# Altium PCB PCB2.pcbdoc
Units mil, origin at the board's own origin, x right, y up, seen from the top; angles counter-clockwise.
Board outline 3264 x 3982 mil, 2 copper layers (Top Layer, Bottom Layer); 42 components, 65 nets, 175 pads, 388 vias.
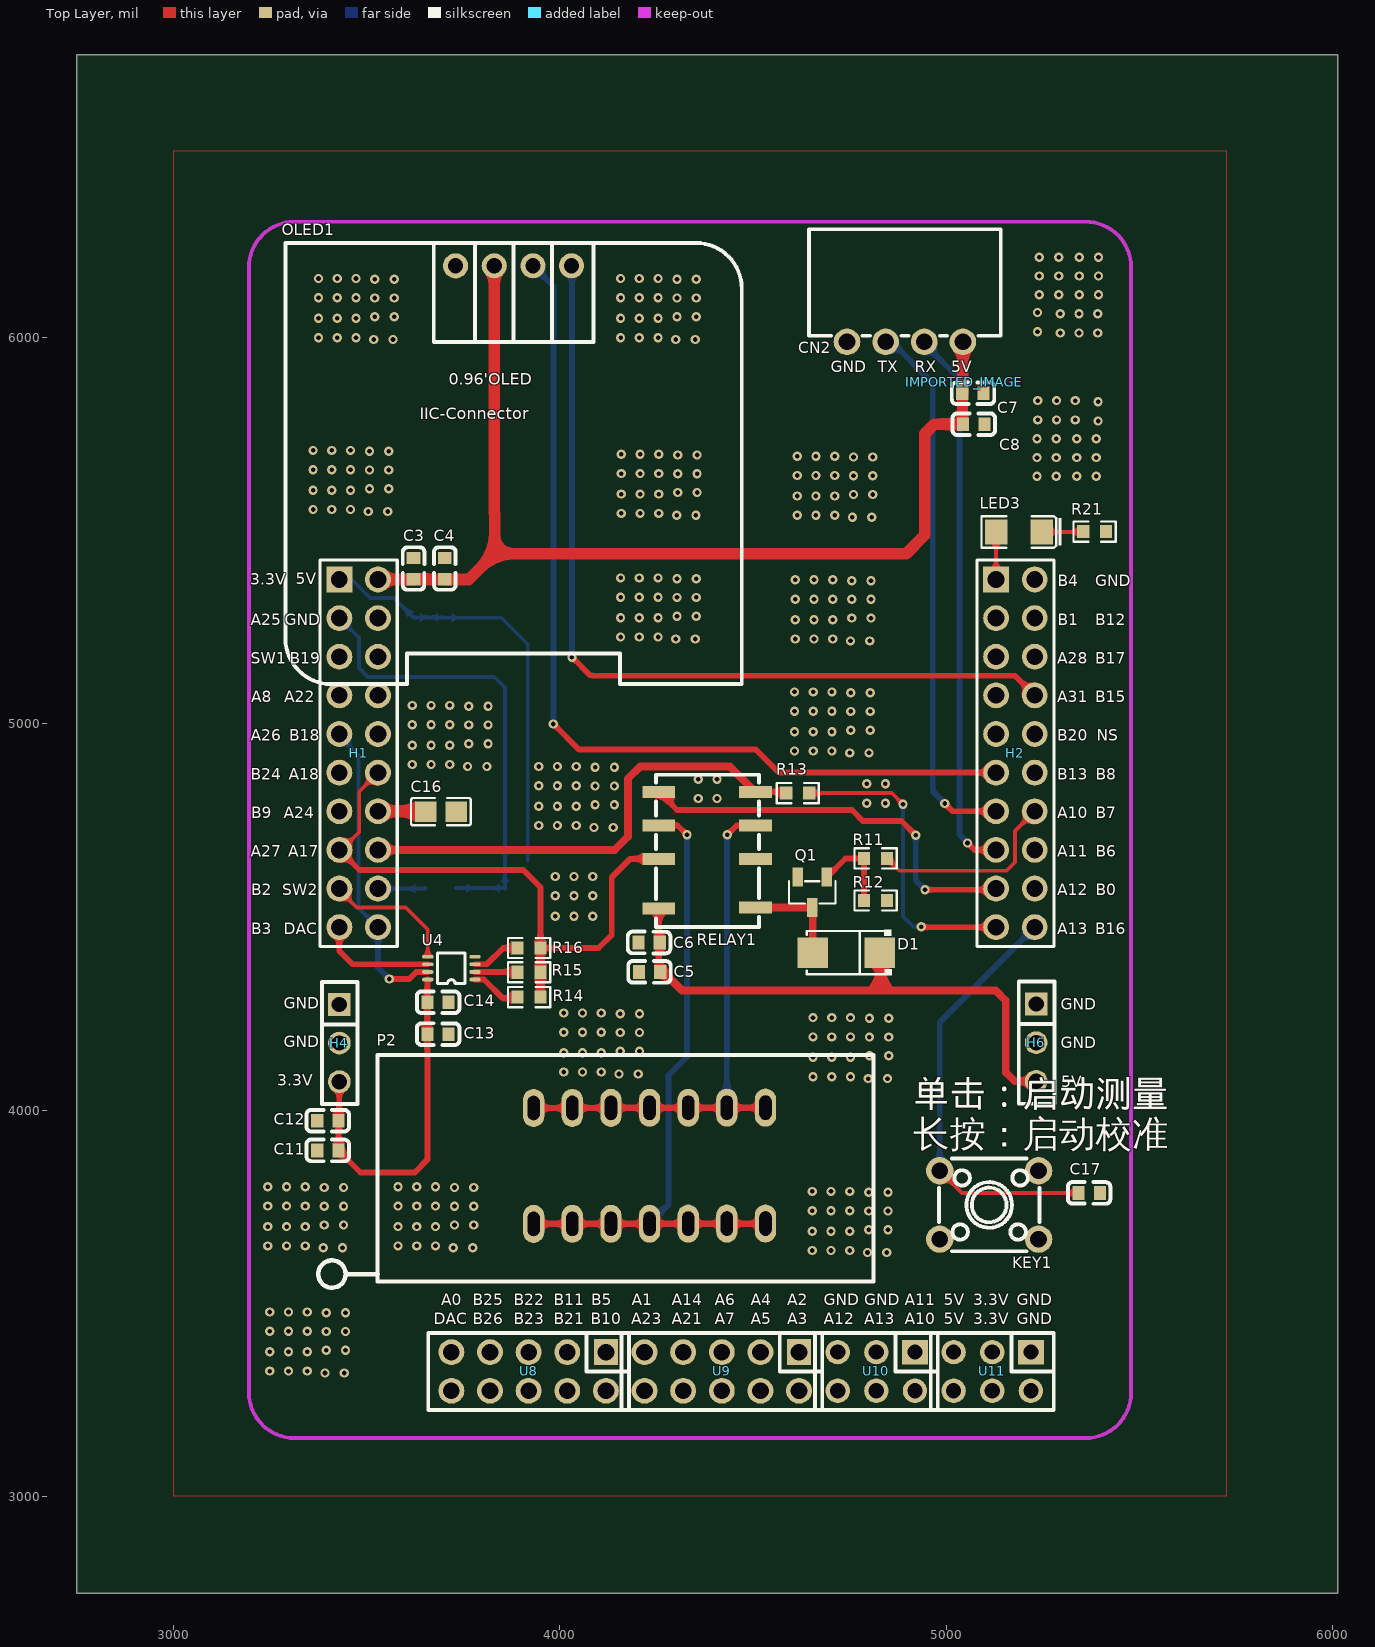
[diagram p0: Top Layer view]
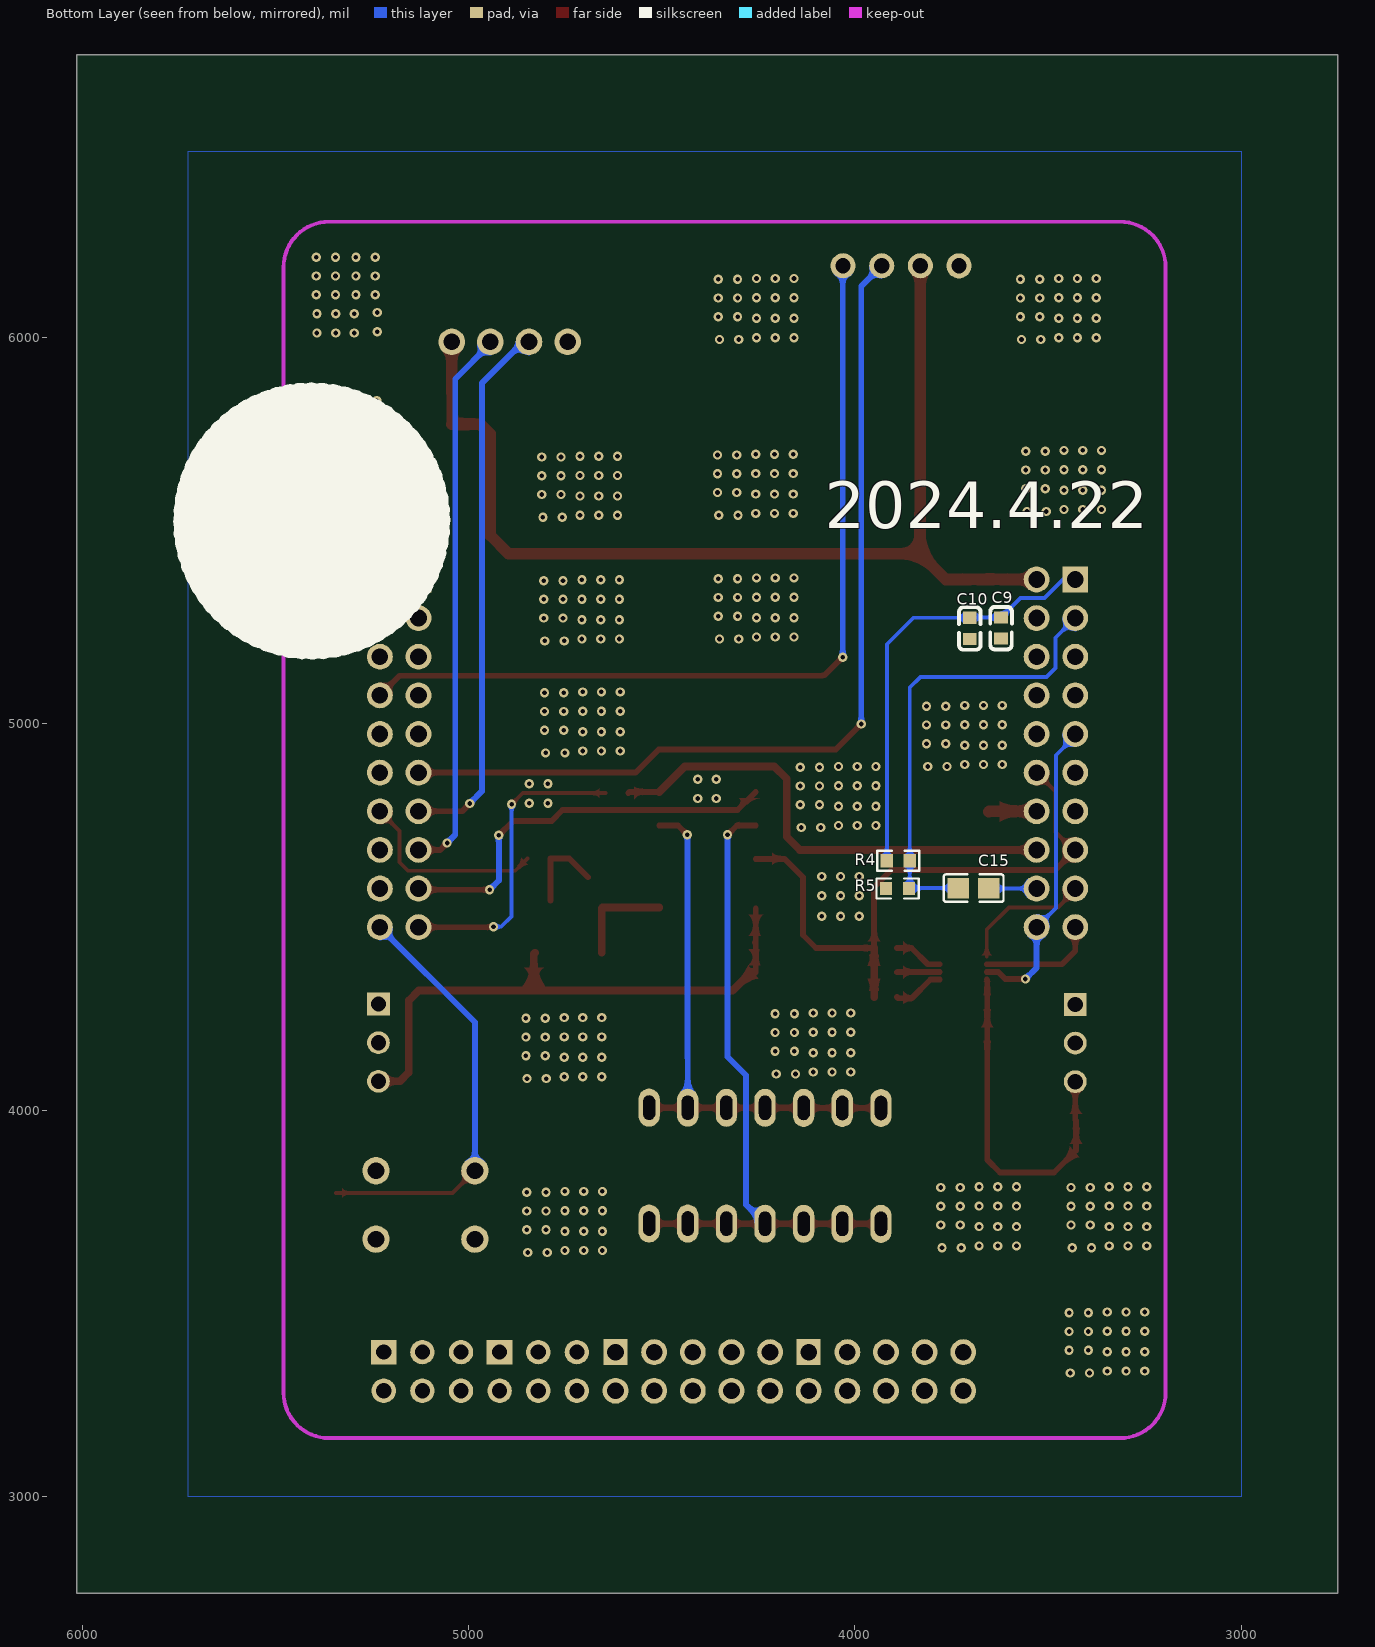
[diagram p1: Bottom Layer view, seen from below]

## Layer stack, top to bottom
Top Layer: signal copper (thickness not stored)
Dielectric: dielectric 12.6, FR-4, Dk 4.8
Bottom Layer: signal copper (thickness not stored)

## Board outline
6014,2750 2750,2750 2750,6732 6014,6732

## Components (designator, comment, footprint, x,y, rotation, side; value= is the part's Value field where it differs from the comment)
C3 "CAP_0603" C0603 3621.56,5401.96 r270 top
C4 "CAP_0603" C0603 3702.45,5401.96 r270 top
C5 "CAP_0603" C0603 4232.56,4358.12 r0 top
C6 "CAP_0603" C0603 4231.56,4434.12 r0 top
C7 "CAP_0603" C0603 5069.56,5855.96 r180 top
C8 "CAP_0603" C0603 5071.56,5775.96 r180 top
C9 "CAP_0603" C0603 3621.56,5248.3 r90 bottom
C10 "CAP_0603" C0603 3702.45,5247.3 r90 bottom
C11 "CAP_0603" C0603 3399.94,3895.96 r0 top
C12 "CAP_0603" C0603 3399.94,3972.96 r0 top
C13 "CAP_0603" C0603 3684.95,4197.17 r180 top
C14 "CAP_0603" C0603 3684.95,4279.78 r180 top
C15 "CAP_0805" C0805 3692.56,4574.96 r0 bottom
C16 "CAP_0805" C0805 3692.56,4772.96 r180 top
C17 "CAP_0603" C0603 5370.56,3785.96 r0 top
CN2 "XH-4AW" CONN-TH_XH-4AW 4893.56,5988.96 r180 top
D1 "SS34_C8678" SMA_L4.3-W2.6-LS5.2-RD 4741.56,4408.03 r180 top
H1 "PZ254V-12-20P" HDR-TH_20P-P2.54-V-M-R2-C10-S2.54 3479.56,4923.96 r270 top
H2 "PZ254V-12-20P" HDR-TH_20P-P2.54-V-M-R2-C10-S2.54 5179.56,4923.96 r270 top
H4 "CS-1165SDIG-1*3" HDR-TH_3P-P2.54_CS-1165SDIG 3429.56,4173.96 r270 top
H6 "CS-1165SDIG-1*3" HDR-TH_3P-P2.54_CS-1165SDIG 5233.28,4174.96 r270 top
IMPORTED_IMAGE "IMPORTED_IMAGE" IMPORTED_IMAGE 5047,5884 r0 top
KEY1 "K4-6×6_SMD" KEY-TH_4P-L6.0-W6.0-P4.50-LS6.5 5111.56,3754.96 r180 top
LED3 "XL-3216UGC" LED1206-R-RD_GREEN 5188.56,5496.96 r180 top
OLED1 "0.96OLED模块_4P" 0.96OLED_4P 3880.56,6185.85 r0 top
P2 "IC锁紧座 14P 2.54mm" "IC锁紧座 14P 2.54mm" 3932.56,3705.96 r90 top
Q1 "SS8050_C2150" SOT-23-3_L2.9-W1.3-P1.90-LS2.4-BR 4653.56,4563.96 r90 top
R4 "Res_0603" R0603 3887.56,4645.96 r180 bottom
R5 "Res_0603" R0603 3889.56,4573.96 r0 bottom
R11 "Res_0603" R0603 4817.49,4651.96 r180 top
R12 "Res_0603" R0603 4817.49,4542.96 r180 top
R13 "Res_0603" R0603 4616.16,4820.96 r180 top
R14 "Res_0603" R0603 3920.56,4292.96 r0 top
R15 "Res_0603" R0603 3920.56,4357.12 r0 top
R16 "Res_0603" R0603 3920.56,4419.96 r0 top
R21 "Res_0603" R0603 5384.56,5497.96 r0 top
RELAY1 "HFD4/5-SR" RELAY-SMD_HFD4-5-SR 4381.56,4672.96 r90 top
U4 "TS5A3359DCUR" VSSOP-8_L2.1-W2.4-P0.50-LS3.2-BR 3719.56,4367.96 r0 top
U8 "2.54-2*5" HDR-TH_10P-P2.54-V-F-R2-C5-S2.54 3919.52,3323.96 r180 top
U9 "2.54-2*5" HDR-TH_10P-P2.54-V-F-R2-C5-S2.54 4419.52,3323.96 r180 top
U10 "PM254-2-03-Z-8.5" HDR-TH_6P-P2.54-V-F-R2-C3-S2.54 4819.52,3323.96 r180 top
U11 "PM254-2-03-Z-8.5" HDR-TH_6P-P2.54-V-F-R2-C3-S2.54 5119.52,3323.96 r180 top

## Footprints (in the part's own frame and the unit in brackets; to place one, negate y for a bottom-side part, rotate by r counter-clockwise, add the part's x,y. Pads: shape width x height; smd on the part's side, far side on the other; paste and mask are expansions set on the pad)
0.96OLED_4P [mm]
  round 1.65 hole 1 copper offset 0,0: 1(-3.81,-0.002) 2(-1.27,0.001) 3(1.27,0.001) 4(3.81,0.001)
  silkscreen extent -15,-27.5 15,1.5
C0603 [mm]
  rect 0.8x0.9 smd: 1(-0.7,0) 2(0.7,0)
  silkscreen extent -1.41,-0.71 1.39,0.72
C0805 [mm]
  rect 1.41x1.35 smd: 1(-1,0) 2(1,0)
  silkscreen extent -1.96,-0.9 1.96,0.9
CONN-TH_XH-4AW [mm]
  round 1.75 hole 1.1: 1(-3.81,0) 2(-1.27,0) 3(1.27,0) 4(3.81,0)
  silkscreen extent -6.3,-7.4 6.3,-0.4
HDR-TH_3P-P2.54_CS-1165SDIG [mm]
  rect 1.5x1.5 hole 1: 1(-2.54,0)
  round 1.5 hole 1: 2(0,0) 3(2.54,0)
  silkscreen extent -4.02,-1.15 4.02,1.2
HDR-TH_6P-P2.54-V-F-R2-C3-S2.54 [mm]
  rect 1.7x1.6 hole 1: 1(-2.54,-1.27)
  round 1.6 hole 1: 2(-2.54,1.27) 3(0,-1.27) 4(0,1.27) 5(2.54,-1.27) 6(2.54,1.27)
  silkscreen extent -4.04,-2.54 4.04,2.54
HDR-TH_10P-P2.54-V-F-R2-C5-S2.54 [mm]
  rect 1.575x1.7 hole 1.1: 1(-5.08,-1.27)
  round 1.7 hole 1.1: 2(-5.08,1.27) 3(-2.54,-1.27) 4(-2.54,1.27) 5(0,-1.27) 6(0,1.27) 7(2.54,-1.27) 8(2.54,1.27) 9(5.08,-1.27) 10(5.08,1.27)
  silkscreen extent -6.6,-2.54 6.6,2.54
HDR-TH_20P-P2.54-V-M-R2-C10-S2.54 [mm]
  rect 1.7x1.7 hole 1.1: 1(-11.43,-1.27)
  round 1.7 hole 1.1: 2(-11.43,1.27) 3(-8.89,-1.27) 4(-8.89,1.27) 5(-6.35,-1.27) 6(-6.35,1.27) 7(-3.81,-1.27) 8(-3.81,1.27) 9(-1.27,-1.27) 10(-1.27,1.27) 11(1.27,-1.27) 12(1.27,1.27) 13(3.81,-1.27) 14(3.81,1.27) 15(6.35,-1.27) 16(6.35,1.27) 17(8.89,-1.27) 18(8.89,1.27) 19(11.43,-1.27) 20(11.43,1.27)
  silkscreen extent -12.7,-2.54 12.7,2.54
"IC锁紧座 14P 2.54mm" [mm]
  oval 2.5x1.4 hole 0.8 slot 1.6 at 0 deg: 1(0,0) 2(0.003,-2.54) 3(0.007,-5.08) 4(0.01,-7.62) 5(0.014,-10.16) 6(0.017,-12.7) 7(0.021,-15.24) 8(7.641,-15.24) 9(7.637,-12.7) 10(7.634,-10.16) 11(7.63,-7.62) 12(7.627,-5.08) 13(7.623,-2.54) 14(7.62,0)
  silkscreen extent -4.2,-22.34 11.1,14.16
IMPORTED_IMAGE [mil]
KEY-TH_4P-L6.0-W6.0-P4.50-LS6.5 [mm]
  round 1.8 hole 1.1: 1(-3.251,-2.25) 2(3.251,-2.25) 3(3.251,2.25) 4(-3.251,2.25)
  silkscreen extent -3.3,-3.05 3.3,3.05
LED1206-R-RD_GREEN [mm]
  rect 1.485x1.62 smd: 1(1.493,0) 2(-1.492,0)
  silkscreen extent -2.77,-1.04 2.46,1.04
R0603 [mil]
  rect 31.75x34.02 smd: 1(-29.66,0) 2(29.66,0)
  silkscreen extent -55,-26 55,26
RELAY-SMD_HFD4-5-SR [mm]
  rect 0.8x2.15 smd: 1(-3.764,-3.175) 2(-0.564,-3.175) 3(1.636,-3.175) 4(3.836,-3.175) 5(3.836,3.175) 6(1.636,3.175) 7(-0.564,3.175) 8(-3.836,3.175)
  silkscreen extent -5.03,-3.41 4.97,3.36
SMA_L4.3-W2.6-LS5.2-RD [mm]
  rect 2x2 smd: 1(-2.2,0) 2(2.2,0)
  silkscreen extent -2.98,-1.5 2.6,1.5
SOT-23-3_L2.9-W1.3-P1.90-LS2.4-BR [mm]
  rect 1.25x0.7 smd: 1(1,-0.95) 2(1,0.95) 3(-1,0)
  silkscreen extent -0.73,-1.53 0.73,1.53
VSSOP-8_L2.1-W2.4-P0.50-LS3.2-BR [mm]
  oval 0.75x0.25 smd: 1(1.55,-0.75) 2(1.55,-0.25) 3(1.55,0.25) 4(1.55,0.75) 5(-1.55,0.75) 6(-1.55,0.25) 7(-1.55,-0.25) 8(-1.55,-0.75)
  silkscreen extent -0.9,-1.02 0.9,1

## Via types
v1: diameter 24, hole 12, Top Layer to Bottom Layer, 388 vias

## Nets (pads, with @x,y where several pads share a name; then routed paths per layer and width w, separated by ;. In a path a pad name is that pad's centre, name@x,y a point inside that pad or via, vN(x,y) a via of type N, cw(c..) or ccw(c..) an arc to the next point about the centre after c; other vN are vias at no path point)
$1N4614: R16.1 U4.3 | length 127.8
  Top Layer w15: U4.3 3811.4,4377.8 3853.56,4419.96 R16.1
$1N4616: R15.1 U4.2 | length 110.7
  Top Layer w15: U4.2 3889.9,4358.12 R15.1
$1N4618: R14.1 U4.1 | length 131.6
  Top Layer w15: U4.1 3804.09,4338.43 3852.56,4289.96 3887.9,4289.96 R14.1
$1N12315: LED3.2 R21.1 | length 108
  Top Layer w10: LED3.2 5353.9,5496.96 R21.1
$1N38664: Q1.1 R11.2 R12.2 | length 226
  Top Layer w15: Q1.1 4739.59,4651.96 R11.2 R12.2
$1N38692: D1.2 Q1.3 RELAY1.8 | length 264.2
  Top Layer w20: 4506.56,4524.75 4653.4,4524.75 Q1.3 4654.95,4523.2 D1.2
+3.3V: C9.2 C10.2 C11.2 C12.2 C13.2 C14.2 H1.1 H4.3 R4.1 U4.8 U11.3 U11.4 | length 2030.5
  Top Layer w15: H4.3 3429.56,3975.02 C12.2 C11.2 3484.5,3838.96 3624.56,3838.96 3657.39,3871.79 C13.2 C14.2 3657.39,4337.27 U4.8
  Bottom Layer w10: H1.1 3461.56,5373.96 3509.56,5325.96 3571.47,5325.96 C9.2 3701.45,5275.86 C10.2 3848.65,5274.86 3917.22,5206.3 R4.1
+5V: C3.2 C4.2 C5.2 C6.2 C7.2 C8.2 CN2.1 D1.1 H1.2 H6.3 OLED1.2 RELAY1.1 U11.5 U11.6 | length 4262.2
  Top Layer w15: 4256.56,4521.95 C6.2@4256.56,4436.68 ; C6.2 C6.2@4256.56,4436.68 ; C5.2 4256.56,4361.68 C6.2@4256.56,4436.68
  Top Layer w20: C5.2 4268.4,4358.12 4316.56,4309.96 4830.88,4309.96 ; D1.1 4830.88,4405.32 4830.88,4309.96 ; H6.3 5177.56,4074.96 5154.56,4097.96 5154.56,4283.96 5128.56,4309.96 4830.88,4309.96
  Top Layer w30: H1.2 3621.12,5373.96 C3.2 C4.2 3702.89,5373.96 3764.56,5373.96 3831.56,5440.96 ; OLED1.2 3830.56,5544.96 3831.56,5543.96 3831.56,5440.96 ; CN2.1 5043.56,5857.52 C7.2 5042,5777.96 C8.2 4969.56,5775.96 4944.56,5750.96 4944.56,5488.96 4896.56,5440.96 3831.56,5440.96
DAC: H1.9 H1.20 U4.7 | length 794.9
  Top Layer w15: v1(3558.56,4339.96) 3610.56,4339.96 3628.72,4358.12 U4.7
  Bottom Layer w10: H1.9 3429.56,4968.96 3479.56,4918.96 3479.56,4523.96 H1.20
  Bottom Layer w15: H1.20 3529.56,4368.96 v1(3558.56,4339.96)
GND: C3.1 C4.1 C5.1 C6.1 C7.1 C8.1 C9.1 C10.1 C11.1 C12.1 C13.1 C14.1 C16.1 C17.2 CN2.4 H1.4 H2.2 H4.1 H4.2 H6.1 H6.2 KEY1.4 OLED1.1 Q1.2 R5.2 R12.1 R21.2 RELAY1.2 U4.4 U10.3 U10.5 U11.1 U11.2
  other v1: 3392.56,3319.96 3442.56,3319.96 3249.56,3324.96 3298.06,3324.96 3346.56,3324.96 3249.56,3374.96 3298.06,3374.96 3346.56,3374.96 3395.56,3378.96 3445.56,3378.96 3395.56,3427.46 3445.56,3427.46 3249.56,3427.96 3298.06,3427.96 3346.56,3427.96 3395.56,3475.96 3445.56,3475.96 3249.56,3477.96 3298.06,3477.96 3346.56,3477.96 4796.56,3631.96 4846.56,3631.96 4653.56,3636.96 4702.06,3636.96 4750.56,3636.96 3387.56,3643.96 3437.56,3643.96 3724.56,3643.96 3774.56,3643.96 3244.56,3648.96 3293.06,3648.96 3341.56,3648.96 3581.56,3648.96 3630.06,3648.96 3678.56,3648.96 4653.56,3686.96 4702.06,3686.96 4750.56,3686.96 4799.56,3690.96 4849.56,3690.96 3244.56,3698.96 3293.06,3698.96 3341.56,3698.96 3581.56,3698.96 3630.06,3698.96 3678.56,3698.96 3390.56,3702.96 3440.56,3702.96 3727.56,3702.96 3777.56,3702.96 4799.56,3739.46 4849.56,3739.46 4653.56,3739.96 4702.06,3739.96 4750.56,3739.96 3390.56,3751.46 3440.56,3751.46 3727.56,3751.46 3777.56,3751.46 3244.56,3751.96 3293.06,3751.96 3341.56,3751.96 3581.56,3751.96 3630.06,3751.96 3678.56,3751.96 4799.56,3787.96 4849.56,3787.96 4653.56,3789.96 4702.06,3789.96 4750.56,3789.96 3390.56,3799.96 3440.56,3799.96 3727.56,3799.96 3777.56,3799.96 3244.56,3801.96 3293.06,3801.96 3341.56,3801.96 3581.56,3801.96 3630.06,3801.96 3678.56,3801.96 4798.56,4081.96 4848.56,4081.96 4655.56,4086.96 4704.06,4086.96 4752.56,4086.96 4153.56,4093.96 4203.56,4093.96 4010.56,4098.96 4059.06,4098.96 4107.56,4098.96 4655.56,4136.96 4704.06,4136.96 4752.56,4136.96 4801.56,4140.96 4851.56,4140.96 4010.56,4148.96 4059.06,4148.96 4107.56,4148.96 4156.56,4152.96 4206.56,4152.96 4801.56,4189.46 4851.56,4189.46 4655.56,4189.96 4704.06,4189.96 4752.56,4189.96 4156.56,4201.46 4206.56,4201.46 4010.56,4201.96 4059.06,4201.96 4107.56,4201.96 4801.56,4237.96 4851.56,4237.96 4655.56,4239.96 4704.06,4239.96 4752.56,4239.96 4156.56,4249.96 4206.56,4249.96 4010.56,4251.96 4059.06,4251.96 4107.56,4251.96 3988.56,4501.96 4037.06,4501.96 4085.56,4501.96 3988.56,4554.96 4037.06,4554.96 4085.56,4554.96 3988.56,4604.96 4037.06,4604.96 4085.56,4604.96 4088.56,4731.96 4138.56,4731.96 3945.56,4736.96 3994.06,4736.96 4042.56,4736.96 3945.56,4786.96 3994.06,4786.96 4042.56,4786.96 4091.56,4790.96 4141.56,4790.96 4794.56,4794.96 4843.06,4794.96 4358.56,4806.96 4407.06,4806.96 4091.56,4839.46 4141.56,4839.46 3945.56,4839.96 3994.06,4839.96 4042.56,4839.96 4794.56,4844.96 4843.06,4844.96 4358.56,4856.96 4407.06,4856.96 4091.56,4887.96 4141.56,4887.96 3761.56,4889.96 3811.56,4889.96 3945.56,4889.96 3994.06,4889.96 4042.56,4889.96 3618.56,4894.96 3667.06,4894.96 3715.56,4894.96 4750.56,4924.96 4800.56,4924.96 4607.56,4929.96 4656.06,4929.96 4704.56,4929.96 3618.56,4944.96 3667.06,4944.96 3715.56,4944.96 3764.56,4948.96 3814.56,4948.96 4607.56,4979.96 4656.06,4979.96 4704.56,4979.96 4753.56,4983.96 4803.56,4983.96 3764.56,4997.46 3814.56,4997.46 3618.56,4997.96 3667.06,4997.96 3715.56,4997.96 4753.56,5032.46 4803.56,5032.46 4607.56,5032.96 4656.06,5032.96 4704.56,5032.96 3764.56,5045.96 3814.56,5045.96 3618.56,5047.96 3667.06,5047.96 3715.56,5047.96 4753.56,5080.96 4803.56,5080.96 4607.56,5082.96 4656.06,5082.96 4704.56,5082.96 4752.56,5214.96 4802.56,5214.96 4300.56,5219.96 4350.56,5219.96 4609.56,5219.96 4658.06,5219.96 4706.56,5219.96 4157.56,5224.96 4206.06,5224.96 4254.56,5224.96 4609.56,5269.96 4658.06,5269.96 4706.56,5269.96 4755.56,5273.96 4805.56,5273.96 4157.56,5274.96 4206.06,5274.96 4254.56,5274.96 4303.56,5278.96 4353.56,5278.96 4755.56,5322.46 4805.56,5322.46 4609.56,5322.96 4658.06,5322.96 4706.56,5322.96 4303.56,5327.46 4353.56,5327.46 4157.56,5327.96 4206.06,5327.96 4254.56,5327.96 4755.56,5370.96 4805.56,5370.96 4609.56,5372.96 4658.06,5372.96 4706.56,5372.96 4303.56,5375.96 4353.56,5375.96 4157.56,5377.96 4206.06,5377.96 4254.56,5377.96 4757.56,5534.96 4807.56,5534.96 4302.56,5539.96 4352.56,5539.96 4614.56,5539.96 4663.06,5539.96 4711.56,5539.96 4159.56,5544.96 4208.06,5544.96 4256.56,5544.96 3504.56,5549.96 3554.56,5549.96 3361.56,5554.96 3410.06,5554.96 3458.56,5554.96 4614.56,5589.96 4663.06,5589.96 4711.56,5589.96 4760.56,5593.96 4810.56,5593.96 4159.56,5594.96 4208.06,5594.96 4256.56,5594.96 4305.56,5598.96 4355.56,5598.96 3361.56,5604.96 3410.06,5604.96 3458.56,5604.96 3507.56,5608.96 3557.56,5608.96 5235.56,5640.96 5285.56,5640.96 5338.56,5640.96 5388.56,5640.96 4760.56,5642.46 4810.56,5642.46 4614.56,5642.96 4663.06,5642.96 4711.56,5642.96 4305.56,5647.46 4355.56,5647.46 4159.56,5647.96 4208.06,5647.96 4256.56,5647.96 3507.56,5657.46 3557.56,5657.46 3361.56,5657.96 3410.06,5657.96 3458.56,5657.96 5235.56,5689.46 5285.56,5689.46 5338.56,5689.46 5388.56,5689.46 4760.56,5690.96 4810.56,5690.96 4614.56,5692.96 4663.06,5692.96 4711.56,5692.96 4305.56,5695.96 4355.56,5695.96 4159.56,5697.96 4208.06,5697.96 4256.56,5697.96 3507.56,5705.96 3557.56,5705.96 3361.56,5707.96 3410.06,5707.96 3458.56,5707.96 5235.56,5737.96 5285.56,5737.96 5338.56,5737.96 5388.56,5737.96 5393.56,5783.96 5237.56,5786.96 5286.06,5786.96 5334.56,5786.96 5393.56,5833.96 5237.56,5836.96 5286.06,5836.96 5334.56,5836.96 3518.56,5994.96 3568.56,5994.96 4300.56,5994.96 4350.56,5994.96 3375.56,5999.96 3424.06,5999.96 3472.56,5999.96 4157.56,5999.96 4206.06,5999.96 4254.56,5999.96 5295.56,6011.96 5344.06,6011.96 5392.56,6011.96 5236.56,6014.96 3375.56,6049.96 3424.06,6049.96 3472.56,6049.96 4157.56,6049.96 4206.06,6049.96 4254.56,6049.96 3521.56,6053.96 3571.56,6053.96 4303.56,6053.96 4353.56,6053.96 5295.56,6061.96 5344.06,6061.96 5392.56,6061.96 5236.56,6064.96 3521.56,6102.46 3571.56,6102.46 4303.56,6102.46 4353.56,6102.46 3375.56,6102.96 3424.06,6102.96 3472.56,6102.96 4157.56,6102.96 4206.06,6102.96 4254.56,6102.96 5241.56,6110.96 5291.56,6110.96 5344.56,6110.96 5394.56,6110.96 3521.56,6150.96 3571.56,6150.96 4303.56,6150.96 4353.56,6150.96 3375.56,6152.96 3424.06,6152.96 3472.56,6152.96 4157.56,6152.96 4206.06,6152.96 4254.56,6152.96 5241.56,6159.46 5291.56,6159.46 5344.56,6159.46 5394.56,6159.46 5241.56,6207.96 5291.56,6207.96 5344.56,6207.96 5394.56,6207.96
GPIO_0: H2.19 R13.1 U10.4 | length 797.3
  Top Layer w10: R13.1 4859.56,4820.96 v1(4888.56,4791.96)
  Top Layer w15: v1(4935.56,4474.96) 4936.56,4473.96 H2.19
  Bottom Layer w10: v1(4888.56,4791.96) 4888.56,4501.96 4915.56,4474.96 v1(4935.56,4474.96)
GPIO_1: H2.17 RELAY1.5 U10.6 | length 1047.6
  Top Layer w15: RELAY1.5 4303.56,4776.96 4756.56,4776.96 4784.56,4748.96 4884.56,4748.96 v1(4921.56,4711.96) ; v1(4945.56,4570.96) 5126.56,4570.96 H2.17
  Bottom Layer w15: v1(4921.56,4711.96) 4921.56,4594.96 v1(4945.56,4570.96)
KEY_START: C17.1 H2.20 KEY1.2 | length 1115.6
  Top Layer w10: KEY1.2 5041.16,3785.96 C17.1
  Bottom Layer w15: KEY1.2 4983.56,4227.96 H2.20
PA0: U8.9
PA1: U9.9
PA2: U9.1
PA3: U9.2
PA4: U9.3
PA5: U9.4
PA6: U9.5
PA7: U9.6
PA8: H1.7
PA10: CN2.3 H2.13 U10.2 | length 1408.4
  Top Layer w15: v1(4996.56,4793.96) 5016.56,4773.96 H2.13
  Bottom Layer w15: CN2.3 4858.56,5988.96 4965.56,5881.96 4965.56,4825.96 4996.56,4794.96 v1(4996.56,4793.96)
PA11: CN2.2 H2.15 U10.1 | length 1424.8
  Top Layer w15: v1(5055.56,4691.96) 5073.56,4673.96 H2.15
  Bottom Layer w15: CN2.2 4943.56,5983.96 5034.56,5892.96 5034.56,4712.96 v1(5055.56,4691.96)
PA14: U9.7
PA16: C15.1 H1.18 | length 133.4
  Top Layer w10: H1.18 H1.18@3536.19,4580.59
  Bottom Layer w10: H1.18 3652.19,4573.96 C15.1
PA17: H1.16 R13.2 RELAY1.4 | length 1262.9
  Top Layer w15: RELAY1.4 4583.5,4823.96 R13.2
  Top Layer w20: H1.16 4142.56,4673.96 4176.56,4707.96 4176.56,4857.96 4208.56,4889.96 4440.56,4889.96 RELAY1.4
PA18: H1.12 H1.15 R14.2 R15.2 R16.2 RELAY1.7 | length 1578.8
  Top Layer w10: H1.15 3434.96,4673.96 3481,4720 3481,4825.4 H1.12
  Top Layer w15: H1.15 3481.56,4621.96 3905.56,4621.96 3950.22,4577.3 R16.2 4100.56,4419.96 4134.56,4453.96 4134.56,4602.96 4182.35,4650.74 RELAY1.7
  Top Layer w20: R14.2 R15.2 R16.2
PA21: U9.8
PA22: H1.8
PA23: U9.10
PA24: C16.2 H1.14 | length 124
  Top Layer w30: H1.14 3652.19,4773.96 C16.2
PA25: C15.2 H1.3 R4.2 R5.1 | length 1196.8
  Bottom Layer w10: H1.3 3480.56,5222.96 3480.56,5144.96 3503.56,5121.96 3830.56,5121.96 3857.9,5094.62 R4.2 3857.9,4575.96 R5.1@3858.9,4574.96 ; C15.2 R5.1@3858.9,4574.96 ; R5.1 R5.1@3858.9,4574.96
PA28: H2.5
PA31: H2.7
PB0: H2.18
PB1: H2.3
PB2: H1.17 U4.5 | length 345.7
  Top Layer w10: H1.17 3429.56,4569.96 3474.56,4524.96 3601.56,4524.96 3658.55,4467.97 U4.5
PB3: H1.19 U4.6 | length 305.1
  Top Layer w15: H1.19 3429.56,4411.96 3463.72,4377.8 U4.6
PB4: H2.1 LED3.1 | length 123.1
  Top Layer w10: H2.1 5129.56,5496.72 LED3.1
PB5: U8.1
PB6: H2.16
PB7: H2.14 R11.1 | length 506.9
  Top Layer w10: R11.1 4879.15,4619.96 5156.56,4619.96 5178.56,4641.96 5178.56,4722.96 H2.14
PB8: H2.12
PB9: H1.13
PB10: U8.2
PB11: U8.3
PB12: H2.4
PB13: H2.11 OLED1.3 | length 2406.1
  Top Layer w15: v1(3983.56,4999.96) 4049.56,4933.96 4507.56,4933.96 4567.56,4873.96 H2.11
  Bottom Layer w15: OLED1.3 3983.56,6132.9 v1(3983.56,4999.96)
PB15: H2.8 OLED1.4 | length 2252.4
  Top Layer w15: v1(4031.56,5172.96) 4078.56,5125.96 4083.56,5125.96 4084.56,5124.96 5178.56,5124.96 H2.8
  Bottom Layer w15: OLED1.4 4031.56,6184.9 v1(4031.56,5172.96)
PB17: H2.6
PB18: H1.10
PB19: H1.6
PB20: H2.9
PB21: U8.4
PB22: U8.5
PB23: U8.6
PB23/PA9: H1.5
PB24: H1.11
PB25: U8.7
PB26: U8.8
PB27: U8.10
ZX+: P2.1 P2.2 P2.3 P2.4 P2.5 P2.6 P2.7 RELAY1.6 | length 1730.2
  Top Layer w15: P2.1 4032.42,3705.96 P2.2 4132.42,3706.09 P2.3 4232.42,3706.23 P2.4 4232.7,3706.5 P2.5 4432.42,3706.5 P2.6 4532.42,3706.63 P2.7 ; RELAY1.6 4305.16,4737.35 v1(4329.56,4712.96)
  Bottom Layer w15: P2.4 4281.56,3755.36 4281.56,4090.69 4329.56,4138.69 v1(4329.56,4712.96)
ZX-: P2.8 P2.9 P2.10 P2.11 P2.12 P2.13 P2.14 RELAY1.3 | length 1390.2
  Top Layer w15: P2.14 4032.42,4005.96 P2.13 4132.42,4006.09 P2.12 4132.7,4006.36 P2.11 4332.42,4006.36 P2.10 4432.42,4006.5 P2.9 4432.7,4006.77 P2.8 ; v1(4433.56,4712.96) 4457.95,4737.35 RELAY1.3
  Bottom Layer w15: P2.9 4432.56,4134.22 4433.3,4134.96 4433.3,4712.69 v1(4433.56,4712.96)
"": H2.10 KEY1.1 KEY1.3

## Polygon pours and split planes (outlines as drawn)
GND on Top Layer (solid, remove dead copper, pour order 0): 3000,3002 5727,3002 5727,6482 3000,6482
GND on Bottom Layer (solid, remove dead copper, pour order 1): 3000,3000 5726,3000 5726,6482 3000,6482

## Keep-outs
Board Outline Layer:
  lines w10 net "": 3195.56,3269.49 ccw(c3313.67,3269.49) 3313.67,3151.38 5360.91,3151.38 ccw(c5360.91,3269.49) 5479.02,3269.49 5479.02,6181.85 ccw(c5360.91,6181.85) 5360.91,6299.96 3313.67,6299.96 ccw(c3313.67,6181.85) 3195.56,6181.85 3195.56,3269.49

## Other copper
Top Layer:
  drawing of 101 lines, arcs and shapes, not listed
Bottom Layer:
  region net PA25: 3829.02,4579.96 3829.02,4569.96 cw(c3829.02,4551.21) 3844.02,4562.46 3844.02,4587.46 cw(c3829.02,4598.71)
  region net PA25: 3862.9,4605.96 3852.9,4605.96 cw(c3834.15,4605.96) 3845.4,4590.96 3870.4,4590.96 cw(c3881.65,4605.96)
  region net PA25: 3852.9,4613.95 3862.9,4613.95 cw(c3881.65,4613.95) 3870.4,4628.95 3845.4,4628.95 cw(c3834.15,4613.95)
  region net PA25: 3862.9,4677.96 3852.9,4677.96 cw(c3834.15,4677.96) 3845.4,4662.96 3870.4,4662.96 cw(c3881.65,4677.96)
  region net +3.3V: 3922.22,4677.96 3912.22,4677.96 cw(c3893.47,4677.96) 3904.72,4662.96 3929.72,4662.96 cw(c3940.97,4677.96)
  region net DAC: 3500.88,4509.71 3493.81,4502.64 3495.19,4501.16 3495.97,4500.22 3496.65,4499.3 3497.23,4498.41 3497.72,4497.54 3498.12,4496.68 3498.44,4495.84 3498.69,4495.02 3498.86,4494.2 3498.97,4493.39 3499.02,4492.58 3499.01,4491.77 3498.96,4490.96 3498.81,4489.74 3498.48,4488.06 3497.13,4482.57 3496.6,4479.96 3496.29,4477.69 3496.14,4475.87 3496.09,4473.93 3496.16,4471.86 3531.66,4507.36 3529.59,4507.42 3527.65,4507.38 3525.82,4507.23 3523.55,4506.92 3520.94,4506.39 3515.45,4505.04 3513.78,4504.71 3512.55,4504.55 3511.74,4504.5 3510.94,4504.5 3510.13,4504.55 3509.32,4504.66 3508.5,4504.83 3507.67,4505.07 3506.83,4505.39 3505.98,4505.79 3505.11,4506.28 3504.22,4506.86 3503.3,4507.54 3502.35,4508.33
  region net DAC: 3522.06,4428.4 3537.06,4428.4 3537.12,4430.18 3537.22,4431.28 3537.36,4432.32 3537.56,4433.29 3537.8,4434.21 3538.08,4435.07 3538.4,4435.88 3538.76,4436.64 3539.16,4437.37 3539.59,4438.05 3540.06,4438.71 3540.56,4439.33 3541.38,4440.23 3542.25,4441.08 3543.52,4442.18 3548.2,4445.82 3550.57,4447.78 3552.6,4449.65 3554.25,4451.36 3554.66,4451.82 3504.46,4451.82 3506.11,4450.06 3507.74,4448.5 3510.14,4446.44 3515.27,4442.45 3516.56,4441.36 3517.46,4440.51 3518.29,4439.64 3518.81,4439.02 3519.3,4438.38 3519.75,4437.71 3520.17,4437.01 3520.55,4436.27 3520.89,4435.48 3521.19,4434.64 3521.45,4433.76 3521.66,4432.81 3521.84,4431.81 3521.96,4430.74 3522.05,4429.01
  region net PA16: 3575.12,4568.96 3575.12,4578.96 3573.1,4579.02 3571.88,4579.14 3570.75,4579.3 3569.71,4579.52 3568.75,4579.8 3567.86,4580.12 3567.04,4580.48 3566.28,4580.9 3565.58,4581.35 3564.93,4581.85 3564.32,4582.38 3563.76,4582.96 3563.22,4583.57 3562.46,4584.55 3561.51,4585.96 3558.59,4590.8 3557.11,4593.02 3555.73,4594.84 3554.54,4596.24 3553.2,4597.64 3551.69,4599.05 3551.69,4548.86 3553.2,4550.27 3554.54,4551.68 3555.73,4553.07 3557.11,4554.9 3558.59,4557.11 3561.51,4561.95 3562.46,4563.37 3563.22,4564.35 3563.76,4564.96 3564.32,4565.53 3564.93,4566.07 3565.58,4566.56 3566.28,4567.02 3567.04,4567.43 3567.86,4567.8 3568.75,4568.12 3569.71,4568.39 3570.75,4568.61 3571.88,4568.78 3573.1,4568.89
  region net DAC: 3455.74,4935.71 3462.81,4942.78 3462.26,4943.4 3461.78,4944.09 3461.37,4944.84 3461.03,4945.65 3460.75,4946.52 3460.53,4947.43 3460.36,4948.39 3460.18,4950.42 3460.18,4952.6 3460.43,4956.05 3461.29,4962.06 3462.75,4971.28 3462.93,4973.32 3462.99,4975.19 3462.96,4976.05 3427.46,4940.56 3430.29,4940.47 3433.45,4940.55 3440.44,4941.07 3442.55,4941.16 3444.19,4941.13 3445.4,4941.03 3446.59,4940.86 3447.38,4940.69 3448.17,4940.49 3448.95,4940.23 3449.74,4939.93 3450.52,4939.57 3451.31,4939.16 3452.1,4938.68 3452.89,4938.15 3453.7,4937.54 3454.92,4936.5
  region net PA25: 3458.24,5238.21 3465.31,5245.28 3463.93,5246.75 3463.15,5247.69 3462.47,5248.61 3461.89,5249.5 3461.4,5250.38 3461,5251.23 3460.68,5252.07 3460.43,5252.9 3460.26,5253.71 3460.15,5254.53 3460.1,5255.33 3460.11,5256.14 3460.16,5256.95 3460.31,5258.18 3460.64,5259.85 3461.99,5265.34 3462.52,5267.95 3462.83,5270.22 3462.98,5272.05 3463.03,5273.99 3462.96,5276.05 3427.46,5240.56 3429.53,5240.49 3431.47,5240.54 3433.3,5240.68 3435.57,5241 3438.18,5241.52 3443.67,5242.88 3445.34,5243.2 3446.57,5243.36 3447.38,5243.41 3448.18,5243.42 3448.99,5243.37 3449.8,5243.26 3450.62,5243.08 3451.45,5242.84 3452.29,5242.52 3453.14,5242.12 3454.01,5241.63 3454.9,5241.05 3455.82,5240.37 3456.77,5239.59
  region net KEY_START: 5192.04,4447.04 5202.65,4436.44 5203.95,4437.66 5204.8,4438.37 5205.64,4439 5206.46,4439.55 5207.28,4440.03 5208.08,4440.44 5208.88,4440.78 5209.68,4441.07 5210.47,4441.3 5211.27,4441.48 5212.06,4441.61 5212.86,4441.69 5214.06,4441.75 5215.29,4441.73 5216.96,4441.62 5222.84,4440.89 5225.9,4440.59 5228.67,4440.48 5231.04,4440.52 5231.66,4440.56 5196.16,4476.05 5196.08,4473.64 5196.13,4471.38 5196.38,4468.23 5197.18,4461.78 5197.32,4460.1 5197.36,4458.87 5197.33,4457.65 5197.26,4456.86 5197.15,4456.06 5197,4455.27 5196.79,4454.47 5196.54,4453.68 5196.22,4452.88 5195.84,4452.08 5195.4,4451.27 5194.88,4450.45 5194.3,4449.62 5193.63,4448.77 5192.47,4447.48
  region net +3.3V: 3602.28,5302.22 3593.24,5297.12 cw(c3566.72,5270.6) 3603.84,5275.9 3623.49,5291.61 cw(c3628.79,5328.73)
  region net +3.3V: 3654.28,5270.86 3654.28,5280.86 cw(c3654.28,5299.61) 3639.28,5288.36 3639.28,5263.36 cw(c3654.28,5252.11)
  region net +3.3V: 3669.74,5280.86 3669.74,5270.86 cw(c3669.74,5252.11) 3684.74,5263.36 3684.74,5288.36 cw(c3669.74,5299.61)
  region net +3.3V: 3735.17,5269.86 3735.17,5279.86 cw(c3735.17,5298.61) 3720.17,5287.36 3720.17,5262.36 cw(c3735.17,5251.11)
  region net PA11: 4968.92,5947.99 4979.53,5958.6 4979.01,5959.18 4978.55,5959.83 4978.15,5960.55 4977.8,5961.33 4977.5,5962.17 4977.25,5963.06 4977.05,5964 4976.76,5966.01 4976.62,5968.16 4976.62,5971.58 4977.02,5977.55 4977.92,5987.59 4977.98,5989.45 4977.94,5991.11 4941.4,5954.57 4949.3,5954.36 4953.81,5954.22 4955.96,5954.04 4957.64,5953.8 4958.87,5953.56 4960.08,5953.26 4961.28,5952.88 4962.46,5952.43 4963.63,5951.89 4964.78,5951.25 4965.92,5950.52 4967.06,5949.67 4968.18,5948.7
  region net PA10: 4878.92,5957.99 4889.53,5968.6 4888,5970.22 4886.48,5972.03 4885.01,5974 4883.6,5976.09 4882.29,5978.27 4881.1,5980.53 4880.06,5982.82 4879.19,5985.13 4878.72,5986.66 4878.35,5988.17 4878.09,5989.66 4877.94,5991.11 4841.4,5954.57 4842.45,5954.55 4843.54,5954.59 4845.25,5954.76 4847.03,5955.05 4850.14,5955.74 4860.03,5958.56 4864.62,5959.74 4867.15,5960.24 4868.99,5960.49 4870.76,5960.61 4871.89,5960.62 4872.99,5960.55 4874.04,5960.41 4875.05,5960.18 4875.53,5960.04 4876.01,5959.87 4876.47,5959.68 4876.91,5959.46 4877.34,5959.22 4877.76,5958.95 4878.16,5958.66 4878.55,5958.34
  region net PA25: 3774.69,4569.96 3774.69,4579.96 cw(c3774.69,4598.71) 3759.69,4587.46 3759.69,4562.46 cw(c3774.69,4551.21)
  region net PA16: 3610.43,4578.96 3610.43,4568.96 cw(c3610.43,4550.21) 3625.43,4561.46 3625.43,4586.46 cw(c3610.43,4597.71)
  region net PB15: 4024.06,6141.68 4039.06,6141.68 4039.11,6143.3 4039.26,6144.8 4039.42,6145.73 4039.61,6146.62 4039.84,6147.46 4040.12,6148.26 4040.42,6149.03 4040.77,6149.76 4041.14,6150.46 4041.55,6151.13 4042.22,6152.09 4042.95,6153 4044.02,6154.17 4045.48,6155.59 4050.51,6160.01 4053.07,6162.43 4054.92,6164.42 4006.2,6164.42 4007.87,6162.64 4009.53,6161.09 4011.57,6159.4 4016.13,6156.08 4018.16,6154.57 4019.39,6153.53 4020.24,6152.71 4020.76,6152.14 4021.26,6151.53 4021.72,6150.9 4022.14,6150.22 4022.53,6149.51 4022.87,6148.74 4023.18,6147.93 4023.44,6147.05 4023.66,6146.12 4023.83,6145.12 4023.96,6144.05 4024.05,6142.3
  region net PB13: 3956.53,6149.33 3967.13,6159.94 3965.96,6161.19 3964.97,6162.41 3964.4,6163.21 3963.9,6163.99 3963.47,6164.78 3963.1,6165.55 3962.79,6166.32 3962.54,6167.09 3962.34,6167.86 3962.18,6168.63 3962.07,6169.4 3961.97,6170.57 3961.95,6171.75 3962.02,6173.35 3962.59,6178.53 3962.96,6182.41 3963.06,6185.07 3963.01,6187.34 3962.98,6187.94 3928.53,6153.48 3930.84,6153.41 3933.53,6153.47 3937,6153.77 3942.7,6154.41 3944.32,6154.5 3945.5,6154.5 3946.67,6154.44 3947.45,6154.34 3948.22,6154.21 3948.98,6154.03 3949.75,6153.8 3950.52,6153.52 3951.3,6153.18 3952.07,6152.78 3952.86,6152.32 3953.65,6151.79 3954.46,6151.18 3955.69,6150.13
  region net KEY_START: 4991.06,3891.8 4976.06,3891.8 4976,3889.86 4975.89,3888.68 4975.73,3887.56 4975.52,3886.52 4975.26,3885.54 4974.96,3884.63 4974.61,3883.77 4974.22,3882.96 4973.79,3882.2 4973.32,3881.48 4972.81,3880.79 4972.26,3880.14 4971.38,3879.21 4970.43,3878.33 4968.7,3876.92 4963.57,3873.08 4960.98,3870.96 4959.22,3869.33 4957.43,3867.49 4956.99,3866.99 5010.13,3866.99 5008.35,3868.9 5006.58,3870.57 5004.4,3872.41 4999.15,3876.36 4997.36,3877.76 4996.05,3878.91 4995.14,3879.83 4994.58,3880.46 4994.05,3881.13 4993.56,3881.83 4993.11,3882.57 4992.7,3883.36 4992.33,3884.19 4992,3885.08 4991.72,3886.03 4991.49,3887.03 4991.3,3888.11 4991.17,3889.26 4991.07,3891.13
  region net ZX+: 4276.03,3739.23 4272.68,3757.09 4269.27,3753.85 4267.17,3752.07 4265.74,3750.99 4264.3,3750.01 4262.85,3749.16 4261.39,3748.44 4259.91,3747.88 4259.17,3747.67 4258.43,3747.5 4257.69,3747.37 4256.94,3747.3 4256.2,3747.28 4255.45,3747.31 4254.7,3747.4 4253.95,3747.55 4253.2,3747.76 4252.46,3748.03 4251.71,3748.36 4250.96,3748.77 4250.21,3749.24 4249.46,3749.78 4260.12,3707.41 4260.17,3709 4260.32,3710.6 4260.57,3712.22 4260.91,3713.84 4261.49,3716 4262.21,3718.17 4263.06,3720.32 4264.28,3722.98 4265.66,3725.59 4267.5,3728.63 4269.49,3731.54 4271.61,3734.3 4273.8,3736.87
  region net ZX-: 4440.06,4077.31 4425.06,4077.31 4425.01,4075.54 4424.74,4072.74 4424.25,4069.81 4423.55,4066.8 4422.66,4063.79 4421.58,4060.81 4420.33,4057.93 4418.91,4055.2 4417.89,4053.49 4416.8,4051.89 4415.64,4050.42 4414.43,4049.09 4413.81,4048.49 4451.31,4048.49 4450.07,4049.74 4448.89,4051.14 4447.77,4052.68 4446.71,4054.33 4445.72,4056.09 4444.35,4058.88 4443.16,4061.79 4442.14,4064.79 4441.31,4067.81 4440.68,4070.79 4440.27,4073.69 4440.11,4075.54
  region net GPIO_0: 4919.22,4479.96 4919.22,4469.96 4919.79,4469.93 4920.36,4469.87 4920.93,4469.76 4921.49,4469.61 4922.05,4469.43 4923.16,4468.98 4924.24,4468.41 4925.28,4467.77 4926.26,4467.07 4927.62,4465.96 4927.62,4483.96 4926.26,4482.84 4925.28,4482.14 4924.24,4481.5 4923.16,4480.94 4922.05,4480.48 4921.49,4480.3 4920.93,4480.15 4920.36,4480.05 4919.79,4479.98
  region net GPIO_1: 4939.31,4587.81 4928.7,4577.21 4930.84,4575.21 4931.6,4574.45 4931.95,4574.07 4932.28,4573.68 4932.57,4573.26 4932.84,4572.83 4933.07,4572.38 4933.26,4571.89 4933.41,4571.37 4933.52,4570.81 4933.58,4570.2 4946.31,4582.93 4945.71,4583 4945.15,4583.11 4944.63,4583.26 4944.14,4583.45 4943.68,4583.68 4943.25,4583.94 4942.84,4584.24 4942.45,4584.56 4941.69,4585.28 4939.74,4587.37
  region net ZX+: 4322.06,4696.62 4337.06,4696.62 4336.96,4699.55 4336.95,4700.62 4336.98,4701.13 4337.03,4701.64 4337.11,4702.14 4337.23,4702.63 4337.39,4703.12 4337.6,4703.6 4337.86,4704.07 4338.18,4704.55 4338.56,4705.02 4320.56,4705.02 4320.94,4704.55 4321.26,4704.07 4321.52,4703.6 4321.73,4703.12 4321.89,4702.63 4322.01,4702.14 4322.09,4701.64 4322.14,4701.13 4322.17,4700.09 4322.07,4697.24
  region net ZX-: 4425.8,4696.62 4440.8,4696.62 4440.78,4699.5 4440.83,4700.59 4440.96,4701.64 4441.07,4702.15 4441.21,4702.65 4441.39,4703.14 4441.61,4703.63 4441.88,4704.1 4442.19,4704.56 4442.56,4705.02 4424.56,4705.02 4424.96,4704.53 4425.28,4704.05 4425.53,4703.57 4425.73,4703.09 4425.87,4702.61 4425.97,4702.13 4426.02,4701.64 4426.05,4701.15 4426.02,4700.12 4425.81,4697.26
  region net GPIO_0: 4883.56,4775.62 4893.56,4775.62 4893.58,4776.19 4893.65,4776.76 4893.76,4777.32 4893.9,4777.89 4894.08,4778.45 4894.54,4779.56 4895.1,4780.64 4895.75,4781.67 4896.45,4782.66 4897.56,4784.02 4879.56,4784.02 4880.67,4782.66 4881.37,4781.67 4882.02,4780.64 4882.58,4779.56 4883.04,4778.45 4883.22,4777.89 4883.36,4777.32 4883.47,4776.76 4883.54,4776.19
  region net GPIO_1: 4914.06,4695.62 4929.06,4695.62 4928.96,4698.55 4928.95,4699.62 4928.98,4700.13 4929.03,4700.64 4929.11,4701.14 4929.23,4701.63 4929.39,4702.12 4929.6,4702.6 4929.86,4703.07 4930.18,4703.55 4930.56,4704.02 4912.56,4704.02 4912.94,4703.55 4913.26,4703.07 4913.52,4702.6 4913.73,4702.12 4913.89,4701.63 4914.01,4701.14 4914.09,4700.64 4914.14,4700.13 4914.17,4699.09 4914.07,4696.24
  region net PA11: 5049.31,4708.81 5038.7,4698.21 5040.84,4696.21 5041.6,4695.45 5041.95,4695.07 5042.28,4694.68 5042.57,4694.26 5042.84,4693.83 5043.07,4693.38 5043.26,4692.89 5043.41,4692.37 5043.52,4691.81 5043.58,4691.2 5056.31,4703.93 5055.71,4704 5055.15,4704.11 5054.63,4704.26 5054.14,4704.45 5053.68,4704.68 5053.25,4704.94 5052.84,4705.24 5052.45,4705.56 5051.69,4706.28 5049.74,4708.37
  region net PA10: 4990.81,4811.31 4980.2,4800.71 4981.37,4799.49 4982.11,4798.63 4982.79,4797.74 4983.4,4796.8 4983.67,4796.32 4983.91,4795.83 4984.11,4795.33 4984.29,4794.81 4984.43,4794.29 4984.53,4793.75 4984.58,4793.2 4997.31,4805.93 4996.65,4806 4996.07,4806.12 4995.55,4806.29 4995.09,4806.5 4994.68,4806.75 4994.31,4807.04 4993.97,4807.36 4993.65,4807.72 4993.05,4808.51 4991.7,4810.33
  region net PB13: 3991.06,5016.29 3976.06,5016.29 3976.16,5013.37 3976.17,5012.3 3976.14,5011.78 3976.09,5011.27 3976.01,5010.77 3975.89,5010.28 3975.73,5009.79 3975.52,5009.31 3975.26,5008.84 3974.94,5008.37 3974.56,5007.89 3992.56,5007.89 3992.18,5008.37 3991.86,5008.84 3991.6,5009.31 3991.39,5009.79 3991.23,5010.28 3991.11,5010.77 3991.03,5011.27 3990.98,5011.78 3990.95,5012.83 3991.05,5015.67
  region net PB15: 4039.06,5189.29 4024.06,5189.29 4024.16,5186.37 4024.17,5185.3 4024.14,5184.78 4024.09,5184.27 4024.01,5183.77 4023.89,5183.28 4023.73,5182.79 4023.52,5182.31 4023.26,5181.84 4022.94,5181.37 4022.56,5180.89 4040.56,5180.89 4040.18,5181.37 4039.86,5181.84 4039.6,5182.31 4039.39,5182.79 4039.23,5183.28 4039.11,5183.77 4039.03,5184.27 4038.98,5184.78 4038.95,5185.83 4039.05,5188.67
  region net DAC: 3552.31,4356.81 3541.7,4346.21 3543.84,4344.21 3544.6,4343.45 3544.95,4343.07 3545.28,4342.68 3545.57,4342.26 3545.84,4341.83 3546.07,4341.38 3546.26,4340.89 3546.41,4340.37 3546.52,4339.81 3546.58,4339.2 3559.31,4351.93 3558.71,4352 3558.15,4352.11 3557.63,4352.26 3557.14,4352.45 3556.68,4352.68 3556.25,4352.94 3555.84,4353.24 3555.45,4353.56 3554.69,4354.28 3552.74,4356.37

## Silkscreen, mask and mechanical layers (free items; w line width, h text height)
Top Silkscreen Layer:
  text "GND" at 4701.07,5909.95 h29.2
  text "TX" at 4822.75,5909.95 h29.2
  text "RX" at 4919.35,5909.95 h29.2
  text "5V" at 5013.35,5909.95 h29.2
  text "5V" at 3316.79,5360.95 h29.2
  text "3.3V" at 3198.78,5359.95 h29.2
  text "B4" at 5289.34,5355.94 h29.2
  text "GND" at 5386.17,5355.94 h29.2
  text "A25" at 3200.07,5256.06 h29.2
  text "GND" at 3287.8,5255.95 h29.2
  text "B1" at 5289.34,5255.94 h29.2
  text "B12" at 5386.17,5255.94 h29.2
  text "SW1" at 3200.07,5156.06 h29.2
  text "B19" at 3301.2,5156.06 h29.2
  text "A28" at 5288.06,5155.94 h29.2
  text "B17" at 5386.17,5155.94 h29.2
  text "A8" at 3201.35,5056.06 h29.2
  text "A22" at 3286.6,5056.06 h29.2
  text "A31" at 5288.06,5055.94 h29.2
  text "B15" at 5386.17,5055.94 h29.2
  text "A26" at 3200.07,4956.06 h29.2
  text "B18" at 3300,4956.06 h29.2
  text "B20" at 5288.06,4955.94 h29.2
  text "NS" at 5389.45,4955.94 h29.2
  text "B24" at 3200.07,4856.06 h29.2
  text "A18" at 3298.8,4856.06 h29.2
  text "B13" at 5288.06,4855.94 h29.2
  text "B8" at 5387.45,4855.94 h29.2
  text "B9" at 3201.35,4756.06 h29.2
  text "A24" at 3285.4,4756.06 h29.2
  text "A10" at 5288.06,4755.94 h29.2
  text "B7" at 5387.45,4755.94 h29.2
  text "A27" at 3200.07,4656.06 h29.2
  text "A17" at 3297.6,4656.06 h29.2
  text "A11" at 5288.06,4655.94 h29.2
  text "B6" at 5387.45,4655.94 h29.2
  text "B2" at 3201.35,4556.06 h29.2
  text "SW2" at 3281.7,4556.06 h29.2
  text "A12" at 5288.06,4555.94 h29.2
  text "B0" at 5387.45,4555.94 h29.2
  text "B3" at 3201.35,4456.06 h29.2
  text "DAC" at 3285.4,4456.06 h29.2
  text "A13" at 5288.06,4455.94 h29.2
  text "B16" at 5386.17,4455.94 h29.2
  text "GND" at 3285.06,4262.94 h29.2
  text "GND" at 5297.06,4259.94 h29.2
  text "GND" at 3285.06,4162.94 h29.2
  text "GND" at 5297.06,4159.94 h29.2
  text "3.3V" at 3269.48,4062.94 h29.2
  text "5V" at 5298.34,4059.94 h29.2
  text "单击：启动测量 /  长按：启动校准" at 4914.8,3905.37 h68.91
  text "A0" at 3693.35,3495.95 h29.2
  text "B25" at 3775.07,3495.95 h29.2
  text "B22" at 3880.53,3495.95 h29.2
  text "B11" at 3985.07,3495.95 h29.2
  text "B5" at 4081.35,3495.95 h29.2
  text "A1" at 4186.82,3495.95 h29.2
  text "A14" at 4290.07,3495.95 h29.2
  text "A6" at 4401.35,3495.95 h29.2
  text "A4" at 4493.82,3495.95 h29.2
  text "A2" at 4589.35,3495.95 h29.2
  text "GND" at 4683.07,3495.95 h29.2
  text "GND" at 4788.53,3495.95 h29.2
  text "A11" at 4893.07,3495.95 h29.2
  text "5V" at 4994.35,3495.95 h29.2
  text "3.3V" at 5070.78,3495.95 h29.2
  text "GND" at 5183.07,3495.95 h29.2
  text "DAC" at 3674.07,3445.95 h29.2
  text "B26" at 3775.07,3445.95 h29.2
  text "B23" at 3880.53,3445.95 h29.2
  text "B21" at 3985.07,3445.95 h29.2
  text "B10" at 4080.07,3445.95 h29.2
  text "A23" at 4185.53,3445.95 h29.2
  text "A21" at 4290.07,3445.95 h29.2
  text "A7" at 4401.35,3445.95 h29.2
  text "A5" at 4493.82,3445.95 h29.2
  text "A3" at 4589.35,3445.95 h29.2
  text "A12" at 4683.07,3445.95 h29.2
  text "A13" at 4788.53,3445.95 h29.2
  text "A10" at 4893.07,3445.95 h29.2
  text "5V" at 4994.35,3445.95 h29.2
  text "3.3V" at 5070.78,3445.95 h29.2
  text "GND" at 5183.07,3445.95 h29.2
Bottom Silkscreen Layer:
  text "2024.4.22" at 4078,5507 h120

## Text inside footprints (layer, text, board x,y; h text height)
OLED1: Top Silkscreen Layer "IIC-Connector" at 3637.88,5789.01 h30.66; Top Silkscreen Layer "0.96'OLED" at 3712.46,5877.5 h30.66